# Altium PCB PCB.PcbDoc
Units mm, origin at the board's own origin, x right, y up, seen from the top; angles counter-clockwise.
Board outline 64.25 x 36 mm, 2 copper layers (Top Layer, Bottom Layer), stack 1.536 mm thick; 34 components, 16 nets, 82 pads, 24 vias.
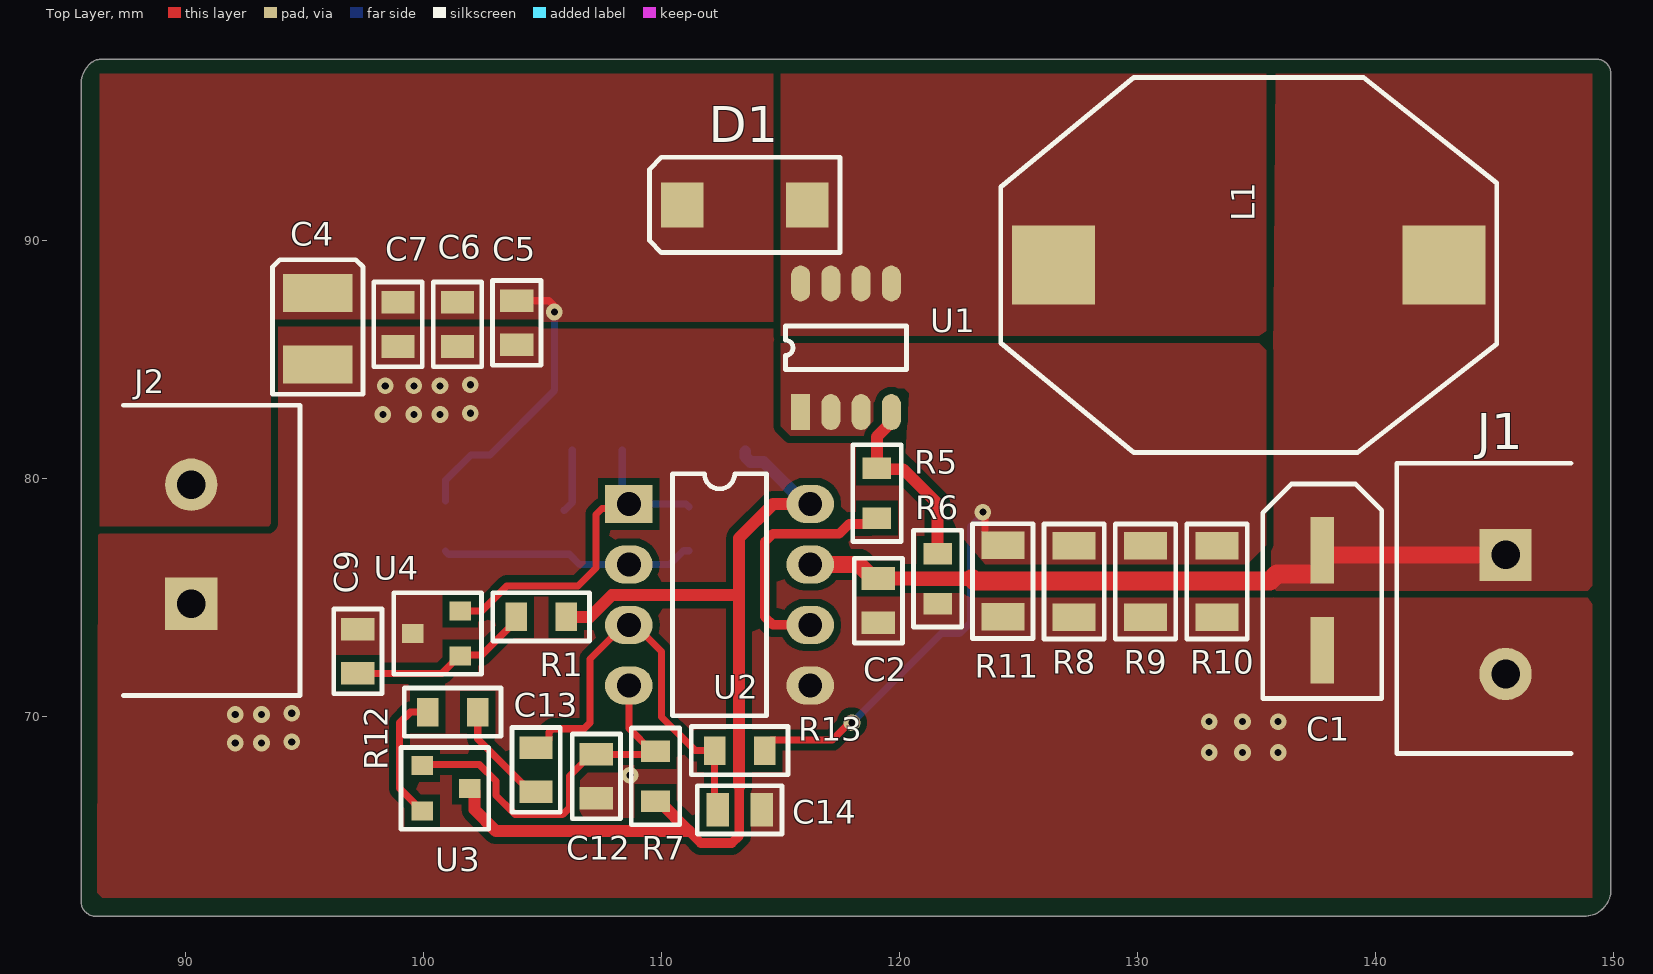
[diagram p0: Top Layer view]
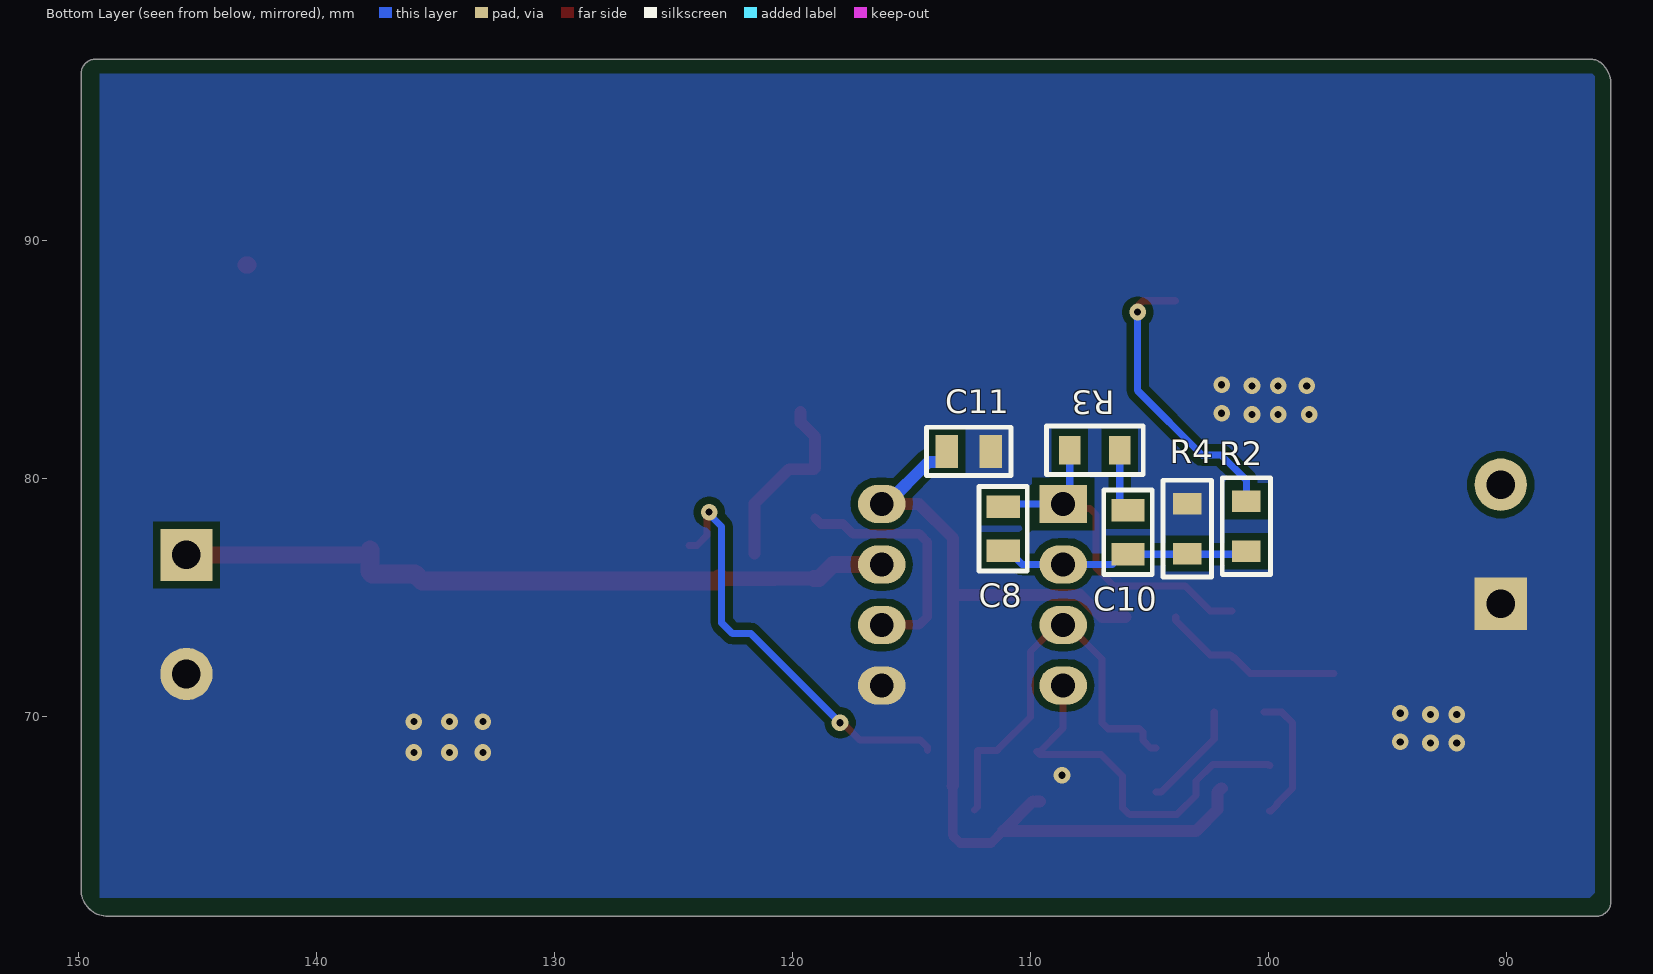
[diagram p1: Bottom Layer view, seen from below]
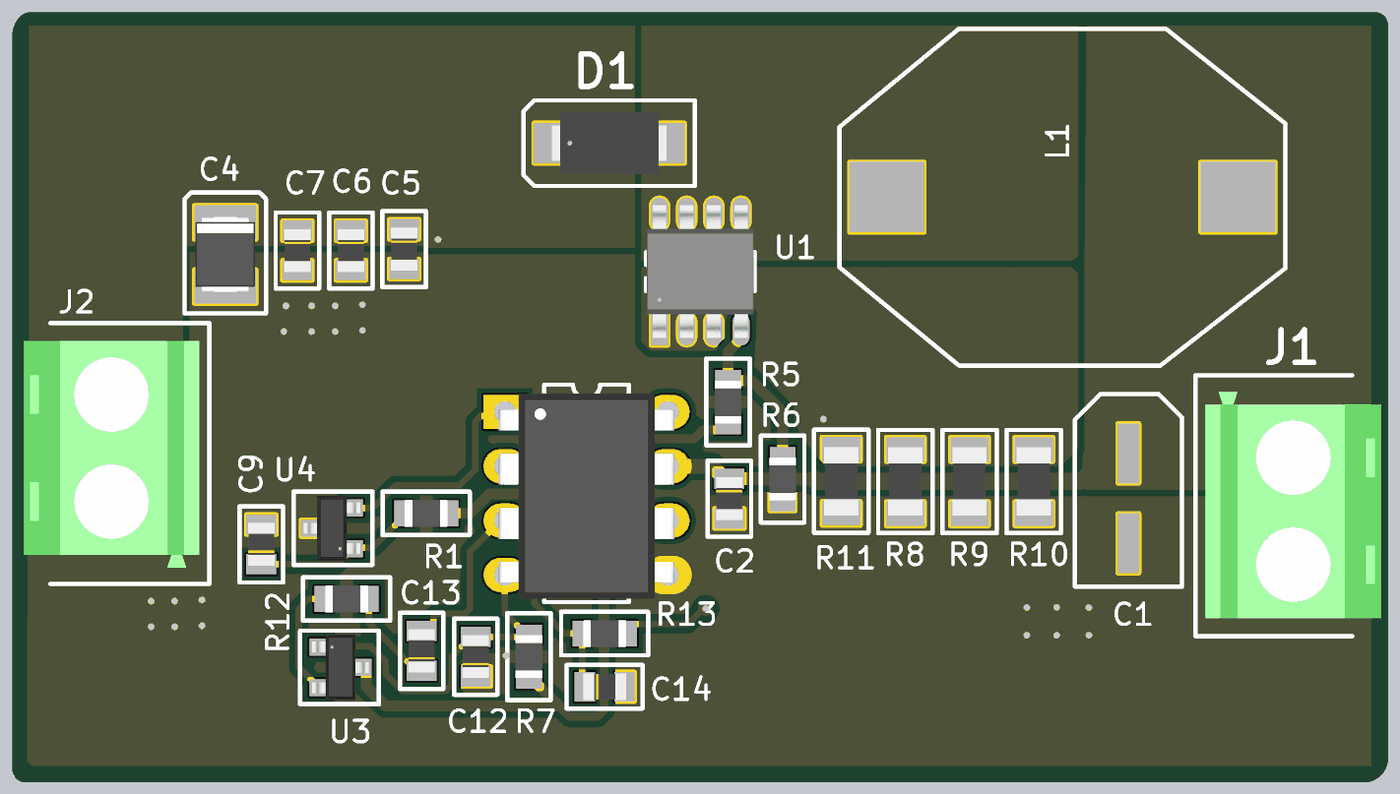
[diagram p2: 3D render of the assembled board from above, using the file's embedded part models]
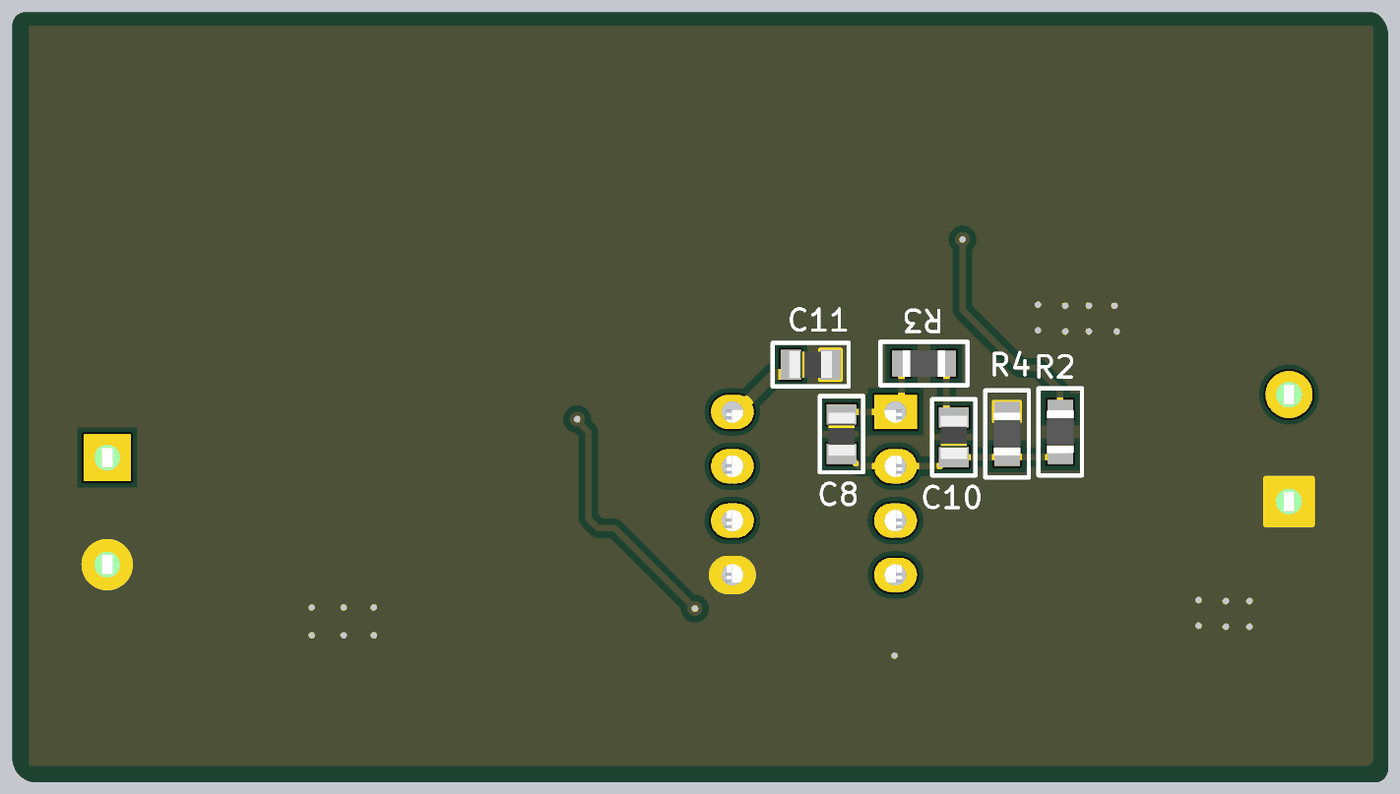
[diagram p3: 3D render of the assembled board from below, using the file's embedded part models]

## Layer stack, top to bottom
Top Solder: solder mask 0.0102, Solder Resist, Dk 3.8
Top Layer: signal copper 0.0356
Dielectric 1: dielectric 1.465, FR-4, Dk 4.6
Bottom Layer: signal copper 0.0356
Bottom Solder: solder mask 0.0102, Solder Resist, Dk 3.8

## Board outline
85.623,62.25 85.623,96.543 cw(c86.854,96.543) 85.983,97.413 cw(c86.5,96.896) 86.5,97.627 149.25,97.627 cw(c149.25,97) 149.877,97 149.877,62.75 cw(c148.75,62.75) 148.75,61.623 86.25,61.623 cw(c86.25,62.25)

## Design rules (kind name [scope] priority, off if disabled: settings)
BoardOutlineClearance [All] p1: gap=0.254 ignorepadtopadclearanceinfootprint=FALSE except(0: Arc-SplitContinuation Track-SplitContinuation SMDPad-SplitContinuation THPad-SplitContinuation Via-SplitContinuation Fill-SplitContinuation Poly-SplitContinuation Region-SplitContinuation Text-SplitContinuation)
Clearance [All] p1: gap=0.3 ignorepadtopadclearanceinfootprint=FALSE except(0.2: Arc-SMDPad Arc-THPad Track-SMDPad Track-THPad SMDPad-SMDPad; 0.35: SMDPad-Via THPad-Via; 0.45: THPad-THPad)
HoleSize [All] p1: absolutevalues=TRUE maxlimit=5 minlimit=0.3 maxpercent=80.000 minpercent=20.000
MinimumAnnularRing [IsPad] p1: minimumring=0.254
MinimumSolderMaskSliver [All] p1: minsoldermaskwidth=0.15
PolygonConnect [All] p1: connectstyle=Direct reliefconductorwidth=0.254 reliefentries=4 polygonreliefangle="90 Angle" airgapwidth=0.254
RoutingVias [All] p1: holewidth=0.3 width=0.75 viastyle="Through Hole" minholewidth=0.3 minwidth=0.7 maxholewidth=0.4 maxwidth=0.8
SilkToSolderMaskClearance [IsPad] p1: minsilkscreentomaskgap=0.21 clearancetoexposedcopper=TRUE
SolderMaskExpansion [IsVia] p1: expansion=0.102 istentingtop=TRUE
SolderMaskExpansion SolderMask_Pad [All] p2: expansion=0.102 istentingtop=FALSE
SupplyNets "Schematic Supply Nets_2" [InNet('+12')] p1: voltage=0.000
SupplyNets "Schematic Supply Nets_1" [InNet('GND')] p2: voltage=0.000
Width [All] p1: maxlimit=20 minlimit=0.3 preferedwidth=0.5 minimp=50.000000 maximp=50.000000 favimp=50.000000
27 further rules are at their usual default settings.

## Components (designator, comment, footprint, x,y, rotation, side; value= is the part's Value field where it differs from the comment)
C1 "47u" CAP_ALUM 137.75,74.9 r90 top value=100µF
C2 "100n" CAP_0805_CER 119.111,74.885 r90 top
C4 "10u" CAP_TANTAL_1210 95.564,86.296 r90 top
C5 "100n" CAP_0805_CER 103.92,86.549 r90 top
C6 "100n" CAP_0805_CER 101.434,86.482 r90 top
C7 "100n" CAP_0805_CER 98.934,86.482 r90 top
C8 "47p" CAP_0805_CER 111.15,77.9 r90 bottom
C9 "100n" CAP_0805_CER 97.25,72.75 r270 top
C10 "3.3n" CAP_0805_CER 105.906,77.752 r270 bottom
C11 "100n" CAP_0805_CER 112.594,81.148 r0 bottom
C12 "0.68n" CAP_0805_CER 107.264,67.5 r270 top
C13 "10n" CAP_0805_CER 104.733,67.773 r270 top
C14 "47p" CAP_0805_CER 113.284,66.094 r180 top
D1 "SCHOTTKY_2A_60V" 23SCHOTTKY_60V_2A 113.5,91.5 r180 top
J1 "ZACISK" Zacisk 145.45,74.3 r270 top
J2 "ZACISK" ZACISK 90.25,77.25 r90 top
L1 "33u" DL50-33 134.666,88.978 r180 top value=32.01µH
R1 "100k" RES_0805 104.95,74.2 r0 top
R2 "20k" RES_0805 100.934,78.009 r90 bottom
R3 "75k" RES_0805 107.3,81.2 r180 bottom
R4 "2.4k" RES_0805 103.42,77.908 r270 bottom
R5 "10" RES_0805 119.05,79.4 r90 top
R6 "100k" RES_0805 121.597,75.802 r90 top
R7 "10k" RES_0805 109.75,67.5 r270 top
R8 "2.4" RES_1206 127.331,75.685 r90 top
R9 "2.4" RES_1206 130.331,75.685 r90 top
R10 "2.4" RES_1206 133.331,75.685 r90 top
R11 "2.4" RES_1206 124.337,75.7 r90 top
R12 "20k" RES_0805 101.231,70.197 r180 top
R13 "4,3k" RES_0805 113.284,68.58 r0 top
U1 "FDS6690A" FDS6690A 117.75,85.5 r90 top
U2 "UC3843N" UC3843N 108.63,78.94 r0 top
U3 "NPN_MMBT3904LT1G" NPN 100.95,67 r270 top
U4 "PNP_BC807-25LT1G" PNP 100.55,73.5 r90 top

## Footprints (in the part's own frame and the unit in brackets; to place one, negate y for a bottom-side part, rotate by r counter-clockwise, add the part's x,y. Pads: shape width x height; smd on the part's side, far side on the other; paste and mask are expansions set on the pad)
23SCHOTTKY_60V_2A [mm]
  rect 1.8x1.9 smd: 1(2.625,0) 2(-2.625,0)
  silkscreen extent -4,-2 4,2, body extent -2.68,-1.45 2.68,1.45, height 2.64
CAP_0805_CER [mm]
  rect 0.95x1.4 smd paste+0: 1(-0.925,0) 2(0.925,0)
  silkscreen extent -1.78,-1.02 1.78,1.02, body extent -1,-0.62 1,0.62, height 1.45
CAP_ALUM [mm]
  rect 2.8x1 smd: 1(-2.1,0) 2(2.1,0)
  silkscreen extent -4.13,-2.5 4.87,2.5
CAP_TANTAL_1210 [mm]
  rect 1.6x2.9 smd: 1(-1.5,0) 2(1.5,0)
  silkscreen extent -2.75,-1.9 2.9,1.9, body extent -1.75,-1.4 1.75,1.41, height 2.11
DL50-33 [mm]
  rect 3.5x3.3 smd: 1(-8.2,0) 2(8.2,0)
  silkscreen extent -10.41,-7.87 10.41,7.87
FDS6690A [mm]
  rect 1.505x0.802 smd: 1(-2.7,1.905)
  oval 1.505x0.802 smd: 2(-2.7,0.635) 3(-2.7,-0.635) 4(-2.7,-1.905) 5(2.7,-1.905) 6(2.7,-0.635) 7(2.7,0.635) 8(2.7,1.905)
  silkscreen extent -0.91,-2.54 0.91,2.54, body extent -3.1,-2.5 3.1,2.5, height 1.76
NPN [mm]
  rect 0.8x0.9 smd: 1(-0.95,-1) 2(0.95,-1) 3(0,1)
  silkscreen extent -1.71,-1.89 1.72,1.79, body extent -1.52,-1.32 1.52,1.32, height 1.12
PNP [mm]
  rect 0.8x0.9 smd: 1(-0.95,-1) 2(0.95,-1) 3(0,1)
  silkscreen extent -1.71,-1.89 1.72,1.79, body extent -1.52,-1.32 1.52,1.32, height 1.12
RES_0805 [mm]
  rect 0.9x1.2 smd paste+0 mask+0.102: 1(-1.05,0) 2(1.05,0)
  silkscreen extent -2.03,-1.02 2.03,1.02, body extent -1,-0.63 1,0.63, height 0.61
RES_1206 [mm]
  rect 1.15x1.8 smd: 1(-1.5,0) 2(1.5,0)
  silkscreen extent -2.41,-1.27 2.41,1.27, body extent -1.6,-0.8 1.6,0.8, height 0.71
UC3843N [mm]
  rect 2x1.6 hole 1: 1(0,0)
  oval 2x1.6 hole 1: 2(0,-2.54) 3(0,-5.08) 4(0,-7.62) 5(7.62,-7.62) 6(7.62,-5.08) 7(7.62,-2.54) 8(7.62,0)
  silkscreen extent 1.84,-8.89 5.78,1.27, body extent -0.29,-8.73 7.91,0.86, height 5.58
Zacisk [mm]
  rect 2.2x2.2 hole 1.2: 1(-2.5,0)
  round 2.2 hole 1.2: 2(2.5,0)
  silkscreen extent -6.35,-4.57 5.84,2.75, body extent -5.6,-4.1 5,4.1, height 10.01
ZACISK [mm]
  rect 2.2x2.2 hole 1.2: 1(-2.5,0)
  round 2.2 hole 1.2: 2(2.5,0)
  silkscreen extent -6.35,-4.57 5.84,2.85, body extent -5.6,-4.1 5,4.1, height 10.01

## Part data
C1: library part CAP_47uF_16V_ALUM, "Kondensator: elektrolityczny; SMD; 47uF; 16VDC; Ø5x5,3mm; ±20%", Case/Package=Radial, Dielectric Material=Aluminium, ESR (Equivalent Series Resistance)=350mΩ, Leakage Current=63µA, Manufacturer=Panasonic, Manufacturer Lifecycle Status=ACTIVE, Max Operating Temperature=105°C, Min Operating Temperature=-55°C, Ripple Current=400mA, Supplier Part Number=7083623P, Tolerance=20%, Voltage=63V, ComponentLink1Description=https://datasheet.octopart.com:443/EEEFK1J101P-Panasonic-datasheet-62287436.pdf?src-supplier=Farnell, ComponentLink1URL=https://datasheet.octopart.com:443/EEEFK1J101P-Panasonic-datasheet-62287436.pdf?src-supplier=Farnell, ComponentLink2Description=https://datasheet.octopart.com:443/EEEFK1J101P-Panasonic-datasheet-5318435.pdf?src-supplier=Farnell, ComponentLink2URL=https://datasheet.octopart.com:443/EEEFK1J101P-Panasonic-datasheet-5318435.pdf?src-supplier=Farnell, ComponentLink3Description=https://datasheet.octopart.com:443/EEEFK1J101P-Panasonic-datasheet-5316599.pdf?src-supplier=Farnell, ComponentLink3URL=https://datasheet.octopart.com:443/EEEFK1J101P-Panasonic-datasheet-5316599.pdf?src-supplier=Farnell, ComponentLink4Description=https://datasheet.octopart.com:443/EEEFK1J101P-Panasonic-datasheet-5390910.pdf?src-supplier=Farnell, ComponentLink4URL=https://datasheet.octopart.com:443/EEEFK1J101P-Panasonic-datasheet-5390910.pdf?src-supplier=Farnell, ComponentLink5Description=https://datasheet.octopart.com:443/EEEFK1J101P-Panasonic-datasheet-7550061.pdf?src-supplier=Farnell, ComponentLink5URL=https://datasheet.octopart.com:443/EEEFK1J101P-Panasonic-datasheet-7550061.pdf?src-supplier=Farnell, ComponentLink6Description=https://datasheet.octopart.com:443/EEEFK1J101P-Panasonic-datasheet-1770.pdf?src-supplier=Farnell, ComponentLink6URL=https://datasheet.octopart.com:443/EEEFK1J101P-Panasonic-datasheet-1770.pdf?src-supplier=Farnell, ComponentLink7Description=https://datasheet.octopart.com:443/EEEFK1J101P-Panasonic-datasheet-1290.pdf?src-supplier=Farnell, ComponentLink7URL=https://datasheet.octopart.com:443/EEEFK1J101P-Panasonic-datasheet-1290.pdf?src-supplier=Farnell, ComponentLink8Description=https://datasheet.octopart.com:443/EEEFK1J101P-Panasonic-datasheet-2601.pdf?src-supplier=Farnell, ComponentLink8URL=https://datasheet.octopart.com:443/EEEFK1J101P-Panasonic-datasheet-2601.pdf?src-supplier=Farnell, ComponentLink9Description=https://datasheet.octopart.com:443/EEEFK1J101P-Panasonic-datasheet-122249.pdf?src-supplier=Farnell, ComponentLink9URL=https://datasheet.octopart.com:443/EEEFK1J101P-Panasonic-datasheet-122249.pdf?src-supplier=Farnell, ComponentLink10Description=https://datasheet.octopart.com:443/EEEFK1J101P-Panasonic-datasheet-4056.pdf?src-supplier=Farnell, ComponentLink10URL=https://datasheet.octopart.com:443/EEEFK1J101P-Panasonic-datasheet-4056.pdf?src-supplier=Farnell, ComponentLink11Description=https://datasheet.octopart.com:443/EEEFK1J101P-Panasonic-datasheet-169278531.pdf?src-supplier=IHS, ComponentLink11URL=https://datasheet.octopart.com:443/EEEFK1J101P-Panasonic-datasheet-169278531.pdf?src-supplier=IHS, ComponentLink12Description=https://datasheet.octopart.com:443/EEEFK1J101P-Panasonic-datasheet-8161.pdf?src-supplier=Newark, ComponentLink12URL=https://datasheet.octopart.com:443/EEEFK1J101P-Panasonic-datasheet-8161.pdf?src-supplier=Newark, ComponentLink13Description=https://datasheet.octopart.com:443/EEEFK1J101P-Panasonic-datasheet-61627622.pdf?src-supplier=Newark, ComponentLink13URL=https://datasheet.octopart.com:443/EEEFK1J101P-Panasonic-datasheet-61627622.pdf?src-supplier=Newark, ComponentLink14Description=https://datasheet.octopart.com:443/EEEFK1J101P-Panasonic-datasheet-8852369.pdf?src-supplier=Newark, ComponentLink14URL=https://datasheet.octopart.com:443/EEEFK1J101P-Panasonic-datasheet-8852369.pdf?src-supplier=Newark, ComponentLink15Description=https://datasheet.octopart.com:443/EEEFK1J101P-Panasonic-datasheet-8712906.pdf?src-supplier=Newark, ComponentLink15URL=https://datasheet.octopart.com:443/EEEFK1J101P-Panasonic-datasheet-8712906.pdf?src-supplier=Newark, ComponentLink16Description=https://datasheet.octopart.com:443/EEEFK1J101P-Panasonic-datasheet-13278598.pdf?src-supplier=Newark, ComponentLink16URL=https://datasheet.octopart.com:443/EEEFK1J101P-Panasonic-datasheet-13278598.pdf?src-supplier=Newark, ComponentLink17Description=https://datasheet.octopart.com:443/EEE-FK1J101P-Panasonic-datasheet-22087609.pdf?src-supplier=Newark, ComponentLink17URL=https://datasheet.octopart.com:443/EEE-FK1J101P-Panasonic-datasheet-22087609.pdf?src-supplier=Newark, ComponentLink18Description=https://datasheet.octopart.com:443/EEEFK1J101P-Panasonic-datasheet-11546739.pdf?src-supplier=Electro+Sonic, ComponentLink18URL=https://datasheet.octopart.com:443/EEEFK1J101P-Panasonic-datasheet-11546739.pdf?src-supplier=Electro+Sonic, ComponentLink19Description=https://datasheet.octopart.com:443/EEEFK1J101P-Panasonic-datasheet-13266987.pdf?src-supplier=RS+(Formerly+Allied+Electronics), ComponentLink19URL=https://datasheet.octopart.com:443/EEEFK1J101P-Panasonic-datasheet-13266987.pdf?src-supplier=RS+(Formerly+Allied+Electronics), ComponentLink20Description=https://datasheet.octopart.com:443/EEE-FK1J101P-Panasonic-datasheet-150469824.pdf?src-supplier=Master+Electronics, ComponentLink20URL=https://datasheet.octopart.com:443/EEE-FK1J101P-Panasonic-datasheet-150469824.pdf?src-supplier=Master+Electronics, ComponentLink21Description=https://datasheet.octopart.com:443/EEEFK1J101P-Panasonic-datasheet-8854493.pdf?src-supplier=Future+Electronics, ComponentLink21URL=https://datasheet.octopart.com:443/EEEFK1J101P-Panasonic-datasheet-8854493.pdf?src-supplier=Future+Electronics, ComponentLink22Description=https://datasheet.octopart.com:443/EEEFK1J101P-Panasonic-datasheet-8711795.pdf?src-supplier=Future+Electronics, ComponentLink22URL=https://datasheet.octopart.com:443/EEEFK1J101P-Panasonic-datasheet-8711795.pdf?src-supplier=Future+Electronics, ComponentLink23Description=https://datasheet.octopart.com:443/EEEFK1J101P-Panasonic-datasheet-5313801.pdf?src-supplier=Future+Electronics, ComponentLink23URL=https://datasheet.octopart.com:443/EEEFK1J101P-Panasonic-datasheet-5313801.pdf?src-supplier=Future+Electronics, ComponentLink24Description=https://datasheet.octopart.com:443/EEEFK1J101P-Panasonic-datasheet-7555708.pdf?src-supplier=Jameco, ComponentLink24URL=https://datasheet.octopart.com:443/EEEFK1J101P-Panasonic-datasheet-7555708.pdf?src-supplier=Jameco, ComponentLink25Description=https://sigma.octopart.com:443/150570760/technical_drawing/Panasonic-EEEFK1J101P.pdf?src-supplier=Panasonic+SCT, ComponentLink25URL=https://sigma.octopart.com:443/150570760/technical_drawing/Panasonic-EEEFK1J101P.pdf?src-supplier=Panasonic+SCT, ComponentLink26Description=https://datasheet.octopart.com:443/EEEFK1J101P-Panasonic-datasheet-136531309.pdf?src-supplier=TME, ComponentLink26URL=https://datasheet.octopart.com:443/EEEFK1J101P-Panasonic-datasheet-136531309.pdf?src-supplier=TME, Contact Plating=Tin, Country of Origin="Japan, Malaysia", Diameter=10mm, Dissipation Factor=8%, Export Control Classification Number (ECCN) Code=EAR99, Harmonized Tariff Schedule (HTS) Code=8532.22.00.20, Height=10.2mm, Height - Seated (Max)=10.4902mm, Impedance=350mΩ, Introduction Date=2004-08-25, Lead Free="Lead Free", Life (Hours)=2000hours, Lifecycle Status=Production, Material=Aluminium, Mounting Technology="Surface Mount", Number of Terminals=2, Packaging="Cut Tape", Part Series=FK, Pins=2, Polarity=Polar, Radiation Hardening=No, REACH SVHC=Yes, Ripple Current (AC)=400mA, RoHS=Compliant, Schedule B="8532220020, 8532220020|8532220020|8532220020|8532220020|8532220020|8532220020|8532220020|8532220020|8532220020|8532220020|8532220020|8532220020|8532220020|8532220020|8532220020|8532220020|8532220020|8532220020|8532220020|8532220020|8532220020|8532220020|8532220020|85", Stock=1435, Supplier=RS, Termination=SMD/SMT, Voltage Rating=63V, Voltage Rating (AC)=63V, Voltage Rating (DC)=63V, Width=10.3mm
C2 C5 C6 C7 C9 C11: library part "CAP_100nF_ 0805_CER", "Kondensator: ceramiczny; MLCC; 100nF; 50V; X7R; ±10%; SMD; 0805"
C4: library part CAP_10uF_1210_TANTALUM, "Kondensator: tantalowo-polimerowy; low ESR; 10uF; 35VDC; B; 1210"
C8 C14: library part "CAP_47pF_ 0805_CER", "Kondensator: ceramiczny; MLCC; 47pF; 50V; C0G (NP0); ±5%; SMD; 0805"
C10: library part CAP_3,3nF_0805_CER, "Kondensator: ceramiczny; MLCC; 3,3nF; 200V; C0G (NP0); ±5%; SMD"
C12: library part CAP_680pF_0805_CER, "Kondensator: ceramiczny; MLCC; 680pF; 50V; C0G (NP0); ±5%; SMD; 0805"
C13: library part CAP_10nF_0805_CER, "Kondensator: ceramiczny; MLCC; 10nF; 50V; C0G (NP0); ±5%; SMD; 0805"
D1: "Dioda: prostownicza Schottky; SMA; SMD; 60V; 2A; rolka,taśma", Average Rectified Current=2A, Case/Package=SMA, Forward Voltage=550mV, Manufacturer=STMicroelectronics, Manufacturer Part Number=STPS2L60A, Max Forward Surge Current (Ifsm)=75A, Max Junction Temperature (Tj)=150°C, Max Repetitive Reverse Voltage (Vrrm)=60V, Max Reverse Leakage Current=100µA, Min Operating Temperature=-65°C, Supplier Part Number=249218P, Category="Schottky Diodes", China RoHS=Non-Compliant, ComponentLink1Description=https://datasheet.octopart.com:443/STPS2L60A-STMicroelectronics-datasheet-10540977.pdf?src-supplier=element14+APAC, ComponentLink1URL=https://datasheet.octopart.com:443/STPS2L60A-STMicroelectronics-datasheet-10540977.pdf?src-supplier=element14+APAC, ComponentLink2Description=https://datasheet.octopart.com:443/STPS2L60A-STMicroelectronics-datasheet-62337125.pdf?src-supplier=Newark, ComponentLink2URL=https://datasheet.octopart.com:443/STPS2L60A-STMicroelectronics-datasheet-62337125.pdf?src-supplier=Newark, ComponentLink3Description=https://datasheet.octopart.com:443/STPS2L60A-STMicroelectronics-datasheet-633754.pdf?src-supplier=element14, ComponentLink3URL=https://datasheet.octopart.com:443/STPS2L60A-STMicroelectronics-datasheet-633754.pdf?src-supplier=element14, ComponentLink4Description=https://datasheet.octopart.com:443/STPS2L60A-STMicroelectronics-datasheet-8474236.pdf?src-supplier=Farnell, ComponentLink4URL=https://datasheet.octopart.com:443/STPS2L60A-STMicroelectronics-datasheet-8474236.pdf?src-supplier=Farnell, ComponentLink5Description=https://datasheet.octopart.com:443/STPS2L60A-STMicroelectronics-datasheet-7700.pdf?src-supplier=DigiKey, ComponentLink5URL=https://datasheet.octopart.com:443/STPS2L60A-STMicroelectronics-datasheet-7700.pdf?src-supplier=DigiKey, ComponentLink6Description=https://datasheet.octopart.com:443/STPS2L60A-STMicroelectronics-datasheet-136784893.pdf?src-supplier=TME, ComponentLink6URL=https://datasheet.octopart.com:443/STPS2L60A-STMicroelectronics-datasheet-136784893.pdf?src-supplier=TME, ComponentLink7Description=https://datasheet.octopart.com:443/STPS2L60A-STMicroelectronics-datasheet-107242832.pdf?src-supplier=TME, ComponentLink7URL=https://datasheet.octopart.com:443/STPS2L60A-STMicroelectronics-datasheet-107242832.pdf?src-supplier=TME, ComponentLink8Description=https://datasheet.octopart.com:443/STPS2L60A-STMicroelectronics-datasheet-14054748.pdf?src-supplier=iiiC, ComponentLink8URL=https://datasheet.octopart.com:443/STPS2L60A-STMicroelectronics-datasheet-14054748.pdf?src-supplier=iiiC, ComponentLink9Description=https://datasheet.octopart.com:443/STPS2L60A-STMicroelectronics-datasheet-9806417.pdf?src-supplier=RS+(Formerly+Allied+Electronics), ComponentLink9URL=https://datasheet.octopart.com:443/STPS2L60A-STMicroelectronics-datasheet-9806417.pdf?src-supplier=RS+(Formerly+Allied+Electronics), Contact Plating=Tin, Current Rating=2A, Element Configuration=Single, Forward Current=2A, Height=2.65mm, Lead Free="Lead Free", Length=4.6mm, Lifecycle Status=Production, Max Operating Temperature=150°C, Max Output current=2A, Max Reverse Voltage (DC)=60V, Max Surge Current=75A, Mounting Technology="Surface Mount", Number of Elements=1, Number of Terminals=2, Output Current=2A, Packaging="Tape and Reel", Peak Non-Repetitive Surge Current=75A, Peak Reverse Current=100µA, Pins=2, Polarity=Standard, Radiation Hardening=No, REACH SVHC=No, Reverse Standoff Voltage=60V, RoHS=Compliant, Schedule B="8541100080, 8541100080|8541100080|8541100080|8541100080|8541100080, 8541100080|8541100080|8541100080|8541100080|8541100080|8541100080, 8541100080|8541100080|8541100080|8541100080|8541100080|8541100080|8541100080|8541100080|8541100080|8541100080|8541100080|8541100080|8541100080|8541100080|8541100080|8541100080|8541100080|8541100080|8541100080|8541100080|8541100080|8541100080|8541100080|85", Stock=4660, Supplier=RS, Voltage Rating (DC)=60V, Weight=4.535924g, Width=2.95mm
L1: library part IND_33uH_3A, "Dławik: drutowy; SMD; 33uH; Ipracy: 3A; R: 0,066Ω; Isat: 5,5A", Case/Package=Nonstandard, Current Rating=3.22A, DC Resistance (DCR)=60mΩ, Inductance Tolerance=20%, Manufacturer=Eaton, Manufacturer Part Number=DRA127-330-R, Max Operating Temperature=165°C, Min Operating Temperature=-40°C, Ratings=AEC-Q200, Saturation Current=6.22A, Self Resonant Frequency=100kHz, Supplier Part Number=283-3593-1-ND, Category="Fixed Inductors", ComponentLink1Description=https://datasheet.octopart.com:443/DRA127-330-R-Eaton-datasheet-137317803.pdf?src-supplier=Master+Electronics, ComponentLink1URL=https://datasheet.octopart.com:443/DRA127-330-R-Eaton-datasheet-137317803.pdf?src-supplier=Master+Electronics, ComponentLink2Description=https://datasheet.octopart.com:443/DRA127-330-R-Eaton-datasheet-613698.pdf?src-supplier=Master+Electronics, ComponentLink2URL=https://datasheet.octopart.com:443/DRA127-330-R-Eaton-datasheet-613698.pdf?src-supplier=Master+Electronics, ComponentLink3Description=https://datasheet.octopart.com:443/DRA127-330-R-Eaton-datasheet-62296927.pdf?src-supplier=Master+Electronics, ComponentLink3URL=https://datasheet.octopart.com:443/DRA127-330-R-Eaton-datasheet-62296927.pdf?src-supplier=Master+Electronics, ComponentLink4Description=https://datasheet.octopart.com:443/DRA127-330-R-Eaton-datasheet-137317933.pdf?src-supplier=Master+Electronics, ComponentLink4URL=https://datasheet.octopart.com:443/DRA127-330-R-Eaton-datasheet-137317933.pdf?src-supplier=Master+Electronics, ComponentLink5Description=https://datasheet.octopart.com:443/DRA127-330-R-Cooper-Industries-datasheet-12525441.pdf?src-supplier=Sager+Electronics, ComponentLink5URL=https://datasheet.octopart.com:443/DRA127-330-R-Cooper-Industries-datasheet-12525441.pdf?src-supplier=Sager+Electronics, ComponentLink6Description=https://datasheet.octopart.com:443/DRA127-330-R-Cooper-Bussmann-datasheet-180236337.pdf?src-supplier=IHS, ComponentLink6URL=https://datasheet.octopart.com:443/DRA127-330-R-Cooper-Bussmann-datasheet-180236337.pdf?src-supplier=IHS, Composition=Wirewound, Core Material=Ferrite, Country of Origin=Philippines, Depth=12.5mm, Export Control Classification Number (ECCN) Code=EAR99, Harmonized Tariff Schedule (HTS) Code=8504.50.80.00, Height=8mm, Height - Seated (Max)=8.001mm, Introduction Date=2006-11-16, Lead Free="Lead Free", Lead Pitch=7.5mm, Length=12.5mm, Lifecycle Status=Production, Max Current Rating=3.22A, Max DC Current=3.22A, Military Standard=Not, Mounting Technology="Surface Mount", Number of Circuits=1, Number of Terminals=2, Packaging="Cut Tape", Pins=2, Pricing="1=2,18, 10=1,796, 25=1,662, 50=1,5668, 100=1,4773 (USD)", Radiation Hardening=No, REACH SVHC=Yes, RMS Current (Irms)=3.22A, RoHS=Compliant, Schedule B="8504500000, 8504500000|8504500000|8504500000|8504500000|8504500000|8504500000|8504500000|8504500000|8504500000|8504500000|8504500000|8504500000|8504500000|8504500000|8504500000|8504500000|8504500000|8504500000|8504500000|8504500000|8504500000|8504500000|8504500000|85", Shielding=Yes, Stock=194, Supplier=DigiKey, Termination=SMD/SMT, Test Frequency=100kHz, Tolerance=20%, Weight=453.59237mg, Width=12.5mm
R1 R6: library part RES_100kΩ_0805, "Rezystor: thick film; SMD; 0805; 100kΩ; 0,125W; ±1%; RC; 150V"
R2 R12: library part RES_20kΩ_0805, "Rezystor: thick film; SMD; 0805; 20kΩ; 0,125W; ±1%; 150V; -55÷155°C"
R3: library part RES_75kΩ_0805, "Rezystor: thick film; SMD; 0805; 75kΩ; 0,125W; ±1%; 150V; -55÷155°C"
R4: library part RES_2,4kΩ_0805, "Rezystor: thick film; SMD; 0805; 2,4kΩ; 0,125W; ±5%; 150V; -55÷155°C"
R5: library part RES_10Ω_0805, "Rezystor: thick film; SMD; 0805; 10Ω; 250mW; ±5%; 150V; -55÷125°C"
R7: library part RES_10kΩ_0805, "Rezystor: thin film; precyzyjny; SMD; 0805; 10kΩ; 0,125W; ±0,1%"
R8 R9 R10 R11: library part RES_2,4Ω_1206, "Rezystor: thick film; SMD; 1206; 2,4Ω; 0,25W; ±1%; 200V; -55÷155°C"
R13: library part RES_4,3kΩ_0805, "Rezystor: thick film; SMD; 0805; 4,3kΩ; 0,125W; ±5%; 150V; -55÷155°C"

## Via types
v1: diameter 0.7, hole 0.3, Top Layer to Bottom Layer, tented both sides, 24 vias

## Nets (pads, with @x,y where several pads share a name; then routed paths per layer and width w, separated by ;. In a path a pad name is that pad's centre, name@x,y a point inside that pad or via, vN(x,y) a via of type N, cw(c..) or ccw(c..) an arc to the next point about the centre after c; other vN are vias at no path point)
+12: C1.2 C2.2 J1.1 L1.1 U2.7 | length 30.7
  Top Layer w0.6: C2.2 120.74,75.81 120.748,75.802 123.048,75.802
  Top Layer w0.7: U2.7 118.3,76.4 118.761,75.939 118.761,75.935 118.886,75.81 C2.2 ; C1.2@137.75,76.95 137.9,76.8 J1.1 ; L1.1 L1.1@142.966,88.978
  Top Layer w0.8: 123.048,75.802 123.15,75.7 135.55,75.7 135.85,76 137.65,76 137.75,76.1 C1.2
+24: C4.2 C5.2 C6.2 C7.2 D1.1 J2.2 R2.2 | length 12.2
  Top Layer w0.3: C5.2 105.276,87.474 105.501,87.249 v1@105.501,87.001
  Bottom Layer w0.3: R2.2 100.934,79.934 102,81 102.8,81 105.5,83.7 v1(105.5,87)
COMP: C8.2 R3.1 U2.1 U4.2 | length 15.2
  Top Layer w0.3: U4.2 102.45,74.45 103.5,75.5 106.5,75.5 107.25,76.25 107.25,78.5 107.5,78.75 108.44,78.75 U2.1
  Bottom Layer w0.3: R3.1 108.35,79.22 U2.1 111.035,78.94 C8.2
D: D1.2 L1.2 U1.5 U1.6 U1.7 U1.8
G: R5.2 R6.2 U1.4 | length 7.9
  Top Layer w0.5: U1.4 119.655,82.367 119.05,81.762 R5.2 119.1,80.4 120.15,80.4 121.597,78.953 R6.2
GND: C1.1 C2.1 C4.1 C5.1 C6.1 C7.1 C9.1 C11.1 C12.2 C14.1 J1.2 J2.1 R4.1 R6.1 R8.1 R9.1 R10.1 R11.1 U2.5 U4.3
  other v1: 108.675,67.55 133,68.5 134.4,68.5 135.9,68.5 92.1,68.9 93.2,68.9 94.475,68.95 133,69.8 134.4,69.8 135.9,69.8 92.1,70.1 93.2,70.1 94.475,70.15 98.3,82.7 99.6,82.7 100.7,82.7 101.975,82.75 98.4,83.9 99.6,83.9 100.7,83.9 101.975,83.95
ISENSE: C13.1 C14.2 R13.1 U2.3 | length 17.7
  Top Layer w0.3: C13.1 104.958,68.698 105.283,69.023 105.283,69.358 105.426,69.5 106.75,69.5 107,69.75 107,72.43 108.43,73.86 U2.3 108.89,73.86 110,72.75 110,70 111.251,68.749 111.42,68.58 R13.1 112.234,66.219 C14.2
NetC10_1: C10.1 R3.2 | length 2.7
  Bottom Layer w0.3: C10.1 105.925,78.677 106.25,79.002 R3.2
NetC13_2: C13.2 R12.1 | length 4.5
  Top Layer w0.3: R12.1 102.281,69.075 104.508,66.848 C13.2
NetR12_2: R12.2 U3.2 | length 5.5
  Top Layer w0.3: U3.2 99.9,66.05 99.65,66.3 99.65,66.35 99,67 99,69.75 99.447,70.197 R12.2
OUTPUT: R5.1 U2.6 | length 10.3
  Top Layer w0.4: U2.6 114.678,73.86 114.336,74.201 114.336,77.351 114.667,77.681 117.461,77.681 117.879,78.1 118.8,78.1 R5.1
PNP_B: C9.2 R1.1 U4.1 | length 7.7
  Top Layer w0.3: C9.2 100.775,71.825 101.45,72.5 U4.1@101.5,72.5 ; U4.1 101.6,72.6 102.45,72.6 103.9,74.05 R1.1
RT/CT: C12.1 R7.1 U2.4 U3.1 | length 16.2
  Top Layer w0.3: U3.1 100,68 102.35,68 103.05,67.3 103.05,66.7 103.751,65.999 103.85,65.9 105.85,65.9 106.132,66.182 106.132,67.518 107.039,68.425 C12.1 109.625,68.425 R7.1 109.6,68.55 108.63,69.52 U2.4
S: R8.2 R9.2 R10.2 R11.2 R13.2 U1.1 U1.2 U1.3 | length 17.8
  Top Layer w0.3: R13.2 114.334,68.73 114.634,69.03 117.172,69.03 117.892,69.75 v1(118,69.75) ; v1(123.5,78.6) 123.5,78.492 123.587,78.405 123.587,77.625 124.012,77.2 R11.2
  Bottom Layer w0.3: v1(118,69.75) 121.75,73.5 122.524,73.5 122.974,73.95 122.974,77.995 123.5,78.521 v1(123.5,78.6)
VFB: C8.1 C10.2 R2.1 R4.2 U2.2 | length 10.7
  Bottom Layer w0.3: R2.1 101.066,76.827 C10.2 106.131,76.827 106.558,76.4 U2.2 110.35,76.4 110.925,76.975 C8.1
VREF: C11.2 R1.2 R7.2 U2.8 U3.3 | length 42.3
  Top Layer w0.4: 111.15,65.2 111.648,64.702 112.952,64.702 113.27,65.02 113.27,67.089
  Top Layer w0.5: U3.3 102,67 102.15,66.85 102.15,66.1 103.05,65.2 111.15,65.2 R7.2@109.9,66.45 ; R1.2 107.002,74.2 107.912,75.11 113.11,75.11 113.25,75.25 ; R7.2@109.6,66.45 R7.2 ; 113.27,67.089 113.25,67.109 113.25,75.25 ; U2.8 114.69,78.94 113.25,77.5 113.25,75.25
  Bottom Layer w0.5: C11.2 113.519,80.923 113.744,80.698 114.292,80.698 116.05,78.94 U2.8

## Polygon pours and split planes (outlines as drawn)
GND on Top Layer "GND_L01_P041" (solid, pour order 41): 86.4,97 149.1,97 149.1,62.4 86.3,62.4
+12 on Top Layer "+12_L01_P039" (solid, pour order 39): 135.6,75.3 148.9,75.3 149.1,75.5 149.1,97 135.8,97
+24 on Top Layer "+24_L01_P040" (solid, pour order 40): 86.4,78 93.5,78 93.6,78.1 93.6,86.7 104.9,86.7 105,86.6 114.8,86.6 114.8,97 86.4,97
D on Top Layer "D_L01_P038" (solid, pour order 38): 115,85.9 115,97 135.4,97 135.4,85.9
S on Top Layer "S_L01_P037" (solid, pour order 37): 115,85.7 115,82.2 115.4,81.8 118.5,81.8 118.9,82.2 118.9,83.2 119.5,83.8 120.2,83.8 120.4,83.6 120.269,81.069 121.537,79.801 122.5,77.7 123.6,76.4 134.6,76.4 135.4,77.2 135.4,85.4 135.1,85.7
GND on Bottom Layer "GND_L02_P042" (solid, pour order 42): 86.4,97 86.301,96.901 86.301,62.612 86.512,62.4 149.1,62.4 149.1,97

## Silkscreen, mask and mechanical layers (free items; w line width, h text height)
Mechanical 1:
  lines w0.254: 87.5,97.5 149.25,97.5 cw(c149.25,97) 149.75,97 149.75,62.75 cw(c148.75,62.75) 148.75,61.75 86.25,61.75 cw(c86.25,62.25) 85.75,62.25 85.75,96.543 cw(c86.854,96.543) 86.073,97.323 cw(c86.5,96.896) 86.5,97.5 87.75,97.5